# EAGLE board w4pcb (EAGLE 9.5.0)
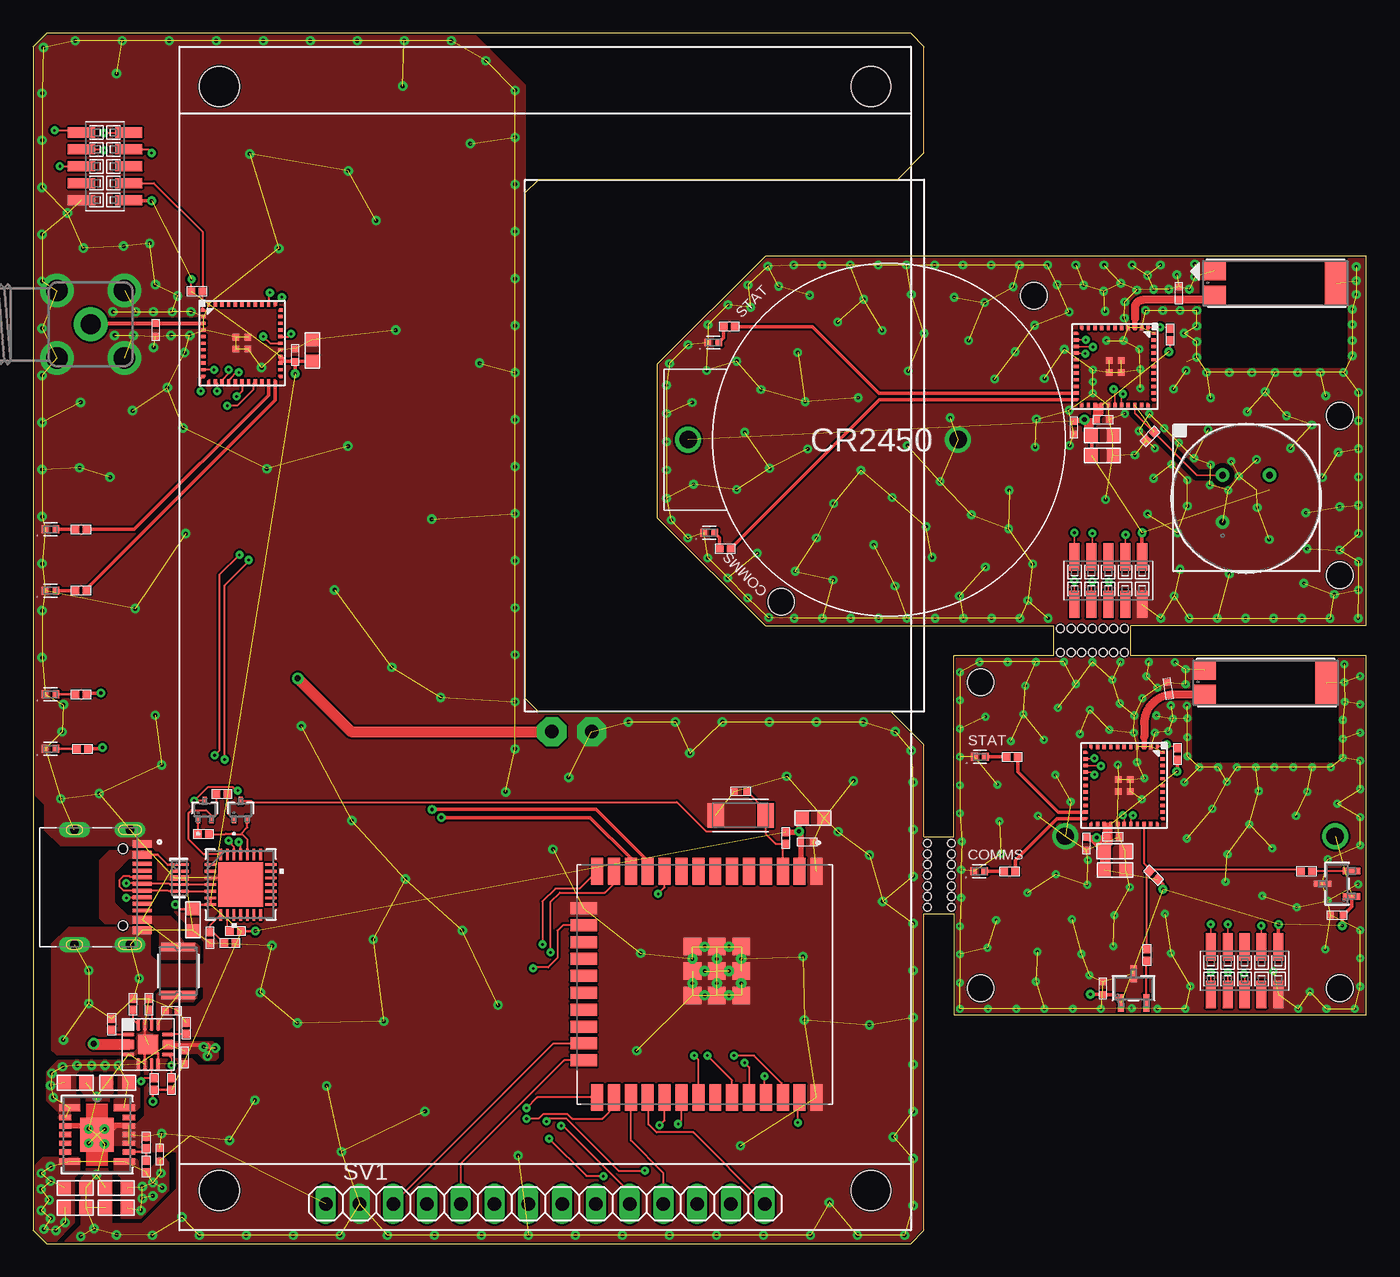
[diagram p0: board, top side]
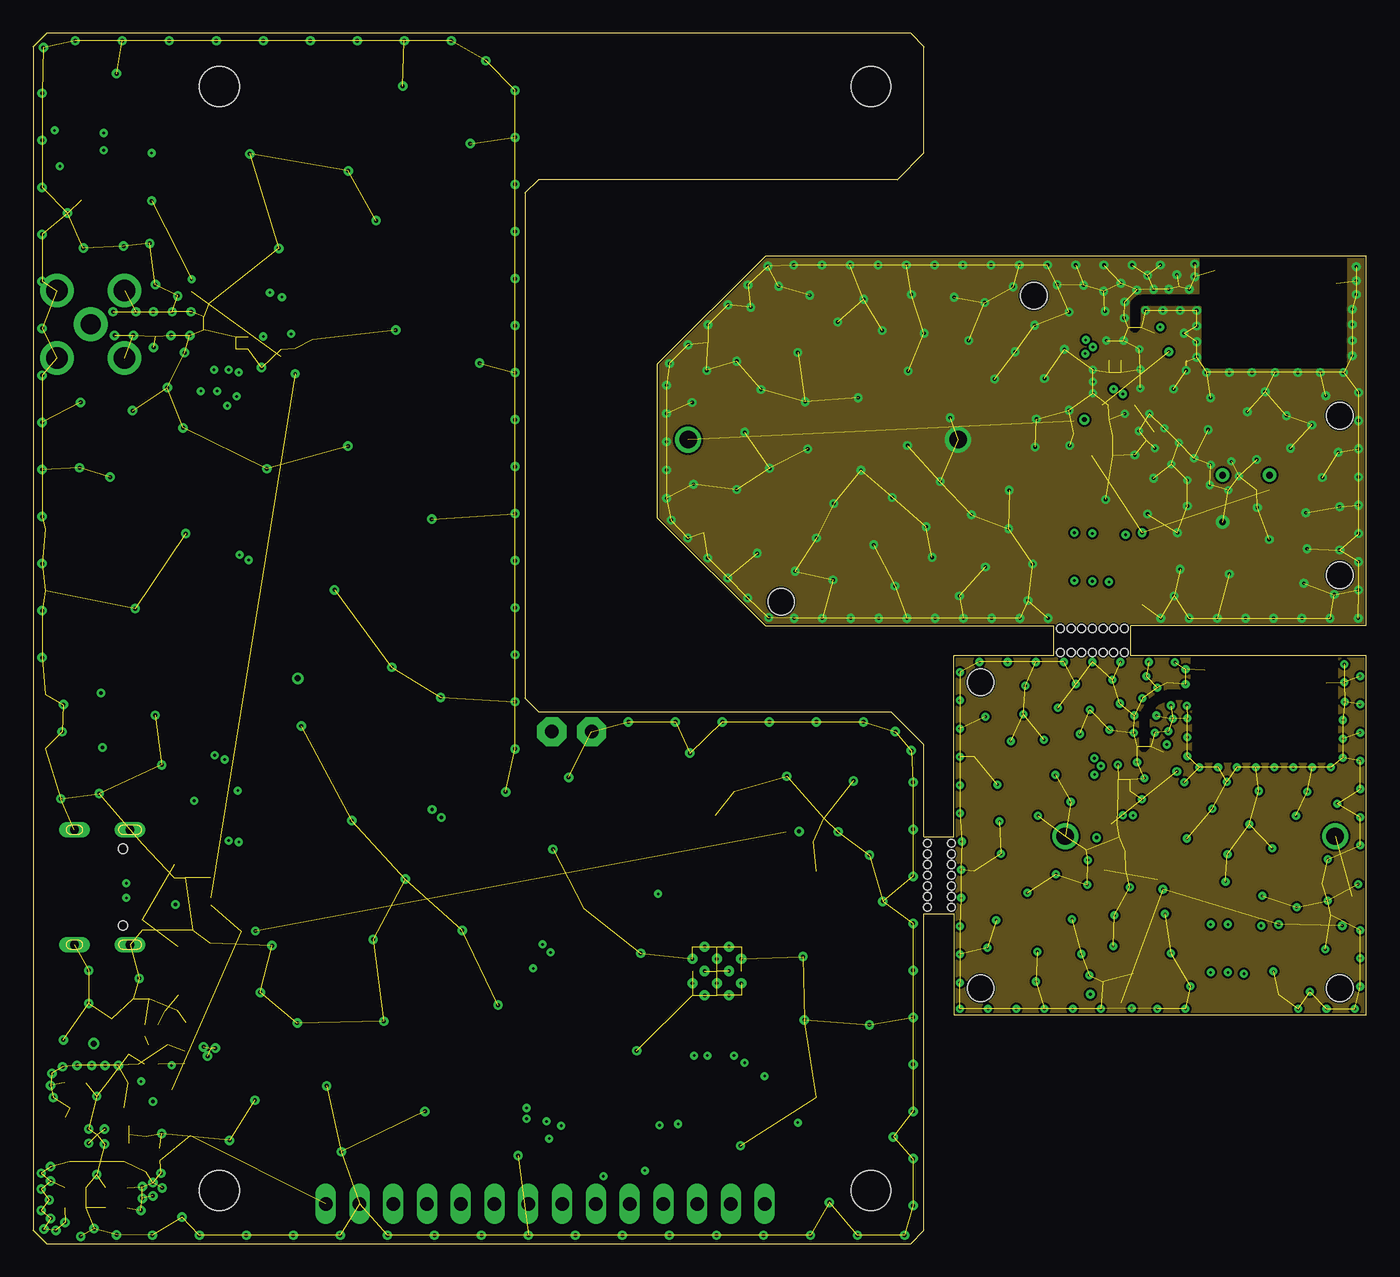
[diagram p1: board, inner layer Route2]
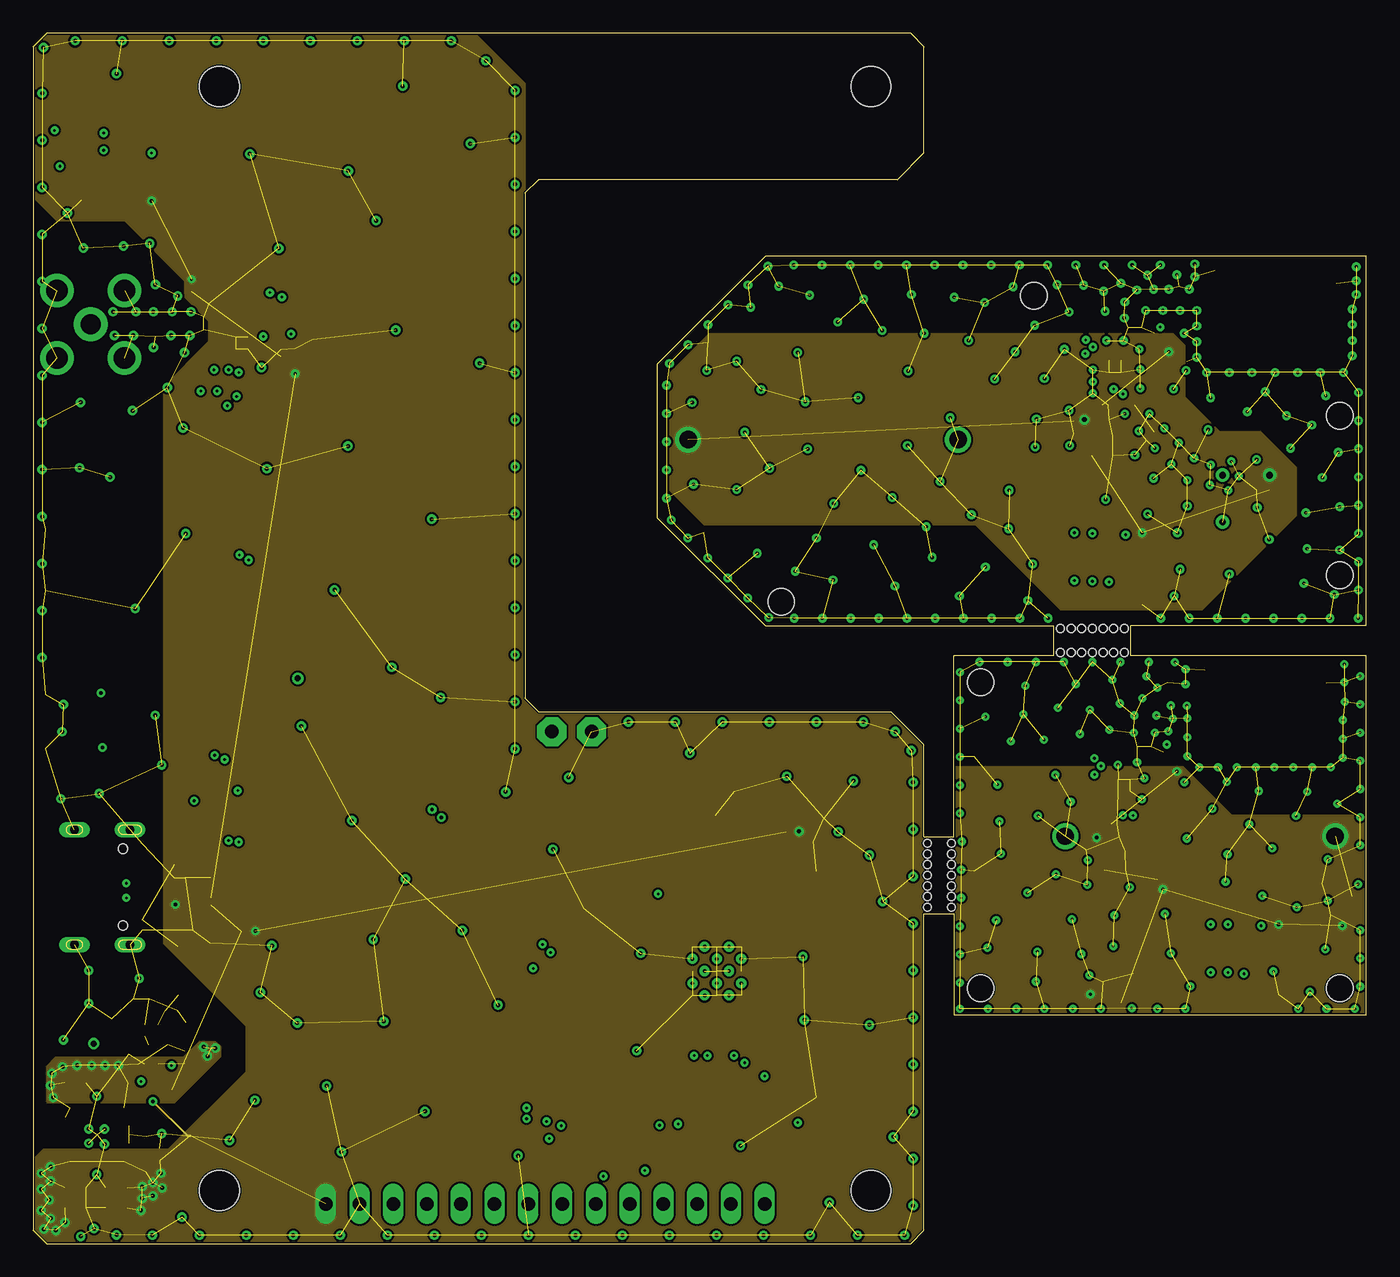
[diagram p2: board, inner layer Route15]
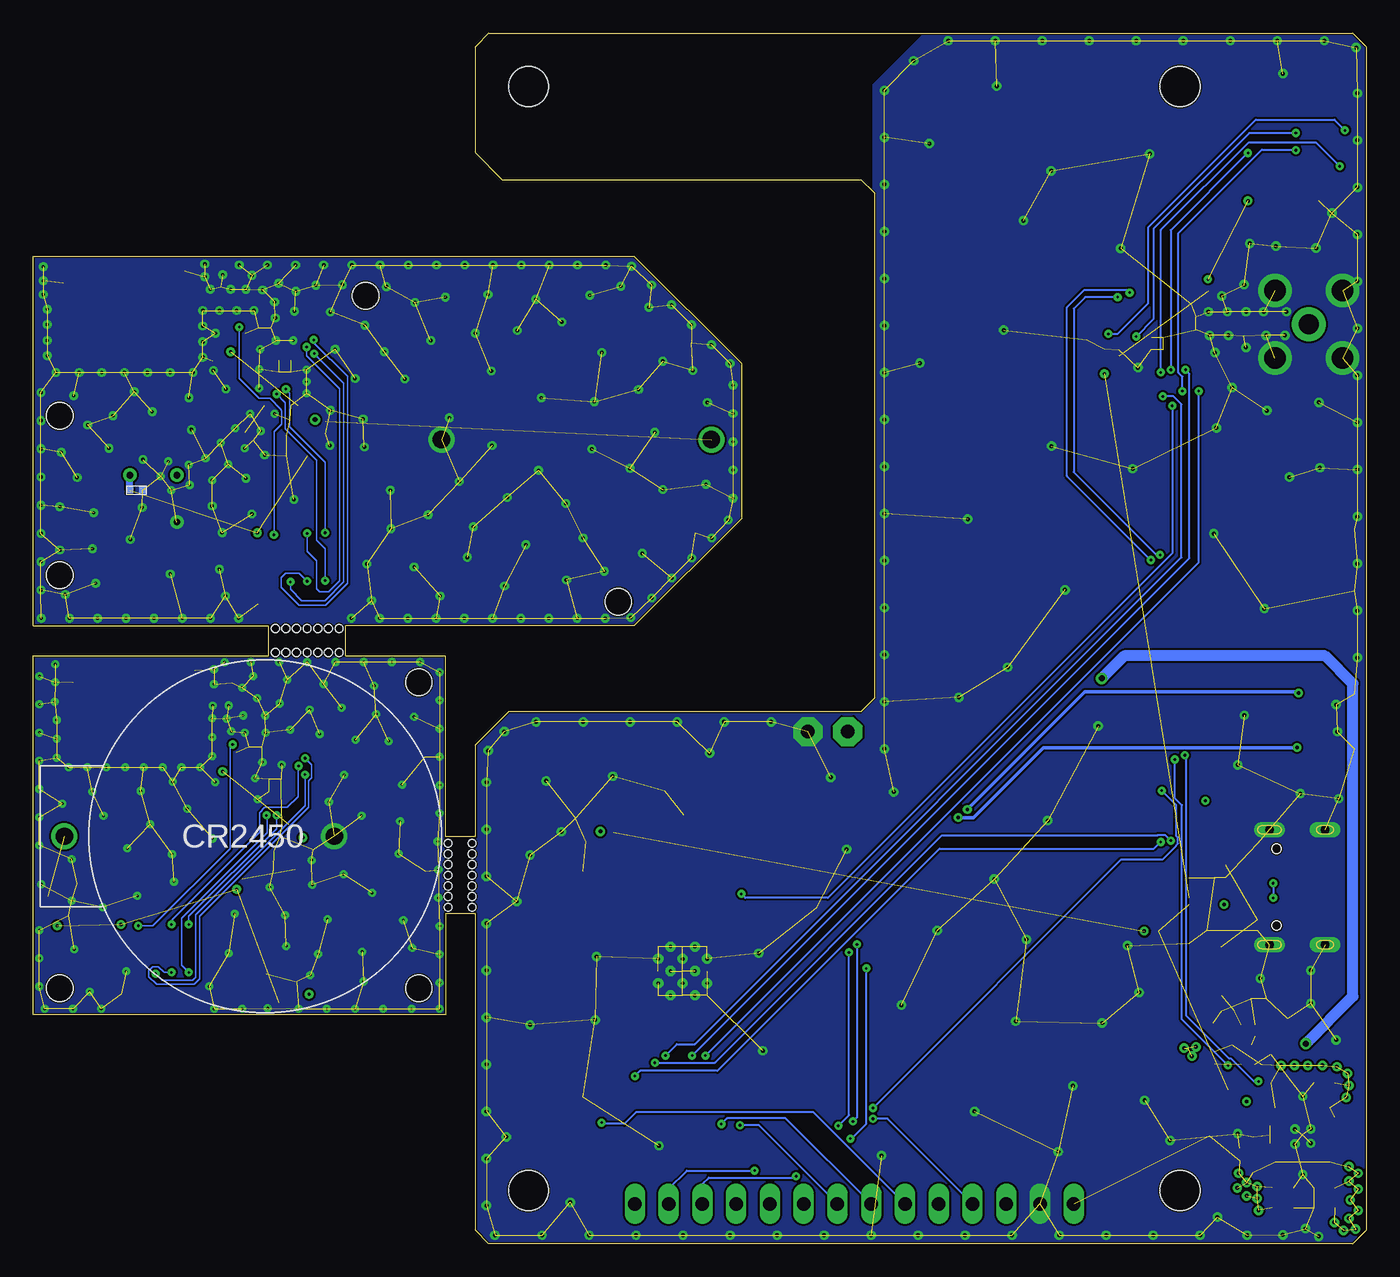
[diagram p3: board, bottom side, seen from below]

Size 100.25 x 91 mm. Coordinates in mm from the lower left corner, seen from the top.
Outline: 100.25,46.45 100.25,74.25 55.05,74.25 46.95,66.15 46.95,54.55 55.05,46.45 76.75,46.45 76.75,44.2 69.25,44.2 69.25,30.6 67,30.6 67,37.5 64.5,40 38,40 37,41 37,79 38,80 65,80 67,82 67,90 66,91 1,91 0,90 0,1 1,0 66,0 67,1 67,24.8 69.25,24.8 69.25,17.2 100.25,17.2 100.25,44.2 82.55,44.2 82.55,46.45 100.25,46.45
Copper layers (1+2*15+16): Top 0.035mm / dielectric 1.5mm / Route2 0.035mm / dielectric 0.15mm / Route15 0.035mm / dielectric 0.2mm / Bottom 0.035mm
Design rules "default *": minimum track width 5mil, minimum drill 0.2mm, track to track 6mil, track to pad 6mil, pad to pad 6mil, via to via 6mil, smd to smd 6mil, copper to edge 5mil, drill to drill 6mil, minimum pad ring 10mil, minimum via ring 8mil, stop-mask expansion 0mil, vias tented up to drill 40mil, thermal gap 0mil
Net classes: 2 NCLS3V7: width 0.178 mm, drill 0.178 mm, clearance 0.178 mm
Holes 2 mm at 56.25,48.25 98.25,50.25 98.25,62.25 75.25,71.25 71.25,19.2 71.25,42.2 98.25,19.2
Holes 0.6 mm at 78.05,46.25 78.85,46.25 79.65,46.25 80.45,46.25 81.25,46.25 82.05,46.25 77.25,46.25 78.05,44.45 78.85,44.45 79.65,44.45 80.45,44.45 81.25,44.45 82.05,44.45 77.25,44.45 69.05,29.3 69.05,28.5 69.05,27.7 69.05,26.9 69.05,26.1 69.05,25.3 69.05,30.1 67.25,29.3 67.25,28.5 67.25,27.7 67.25,26.9 67.25,26.1 67.25,25.3 67.25,30.1
Holes 3 mm at 63,4 14,4 63,87 14,87
tRestrict: area 88.7,57.1 to 90.2,58.5; 35 lines

## Footprints (pad centres in the part's own frame; a part is rotated, then mirrored left to right if it is on the bottom)
C0603R = smd 0.95 x 0.95: 1 -0.85,0; 2 0.75,0
C0402 = smd 0.5 x 0.5: 1 -0.475,0; 2 0.475,0
LEDC1005X35N = smd 0.59 x 0.61: 1 -0.415,0; 2 0.415,0
DPADS_0400-S = drill 1.016 pad 2.184 octagon: PAD 0,0
1210LSERIES_LTF-L = smd 0.635 x 2.591: 1 -1.816,0; 2 1.816,0
HRO_TYPE-C-31-M-12 = smd 0.6 x 1.45: A1B12 -3.25,5.095; A4B9 -2.45,5.095; B1A12 3.25,5.095; B4A9 2.45,5.095 | smd 0.3 x 1.45: A5 -1.25,5.095; A6 -0.25,5.095; A7 0.25,5.095; A8 1.25,5.095; B5 1.75,5.095; B6 0.75,5.095; B7 -0.75,5.095; B8 -1.75,5.095 | drill 0.65 pad 1.05 long: S1 -4.32,4.18; S2 4.32,4.18; S3 -4.32,0; S4 4.32,0 | hole 0.7: -2.89,3.65; 2.89,3.65
R0402 = smd 0.6 x 0.55: 1 -0.425,0; 2 0.425,0
RESC4217X170 = smd 1.254 x 1.829: 1 -1.875,0; 2 1.875,0
1X14 = drill 1.016 long: 1 -16.51,0; 2 -13.97,0; 3 -11.43,0; 4 -8.89,0; 5 -6.35,0; 6 -3.81,0; 7 -1.27,0; 8 1.27,0; 9 3.81,0; 10 6.35,0; 11 8.89,0; 12 11.43,0; 13 13.97,0; 14 16.51,0
SM353LT_HNW = smd 0.466 x 1.31: 1 -0.953,-1.092; 2 0.953,-1.092; 3 0,1.092
CHIP_3211_PUL = smd 1.7 x 1.45: 1 -4.277,-0.9; 3 -4.277,0.95 | smd 1.7 x 3.2: 2 4.877,0
SENSOR_B1201111_PAN = drill 0.508 pad 1.016: 1 0,0; 2 0,3.531; 3 3.531,3.531
S-PVQFN-N16 = smd 0.85 x 0.28: 1 -0.725,2.225; 4 -0.725,0.725; 9 2.225,0.725; 12 2.225,2.225 | smd 0.85 x 0.78: 2 -0.725,1.475; 10 2.225,1.475 | smd 0.28 x 0.85: 5 0,0; 6 0.5,0; 7 1,0; 8 1.5,0; 13 1.5,2.95; 14 1,2.95; 15 0.5,2.95; 16 0,2.95 | smd 1.5 x 1.5: TH 0.75,1.475
SC-75_ONS-L = smd 0.305 x 0.61: 1 -0.5,-0.699; 2 0.5,-0.699; 3 0,0.699
QFN28_5X5_SIL-L = smd 0.864 x 0.203: 1 -2.273,1.5; 2 -2.273,1; 3 -2.273,0.5; 4 -2.273,0; 5 -2.273,-0.5; 6 -2.273,-1; 7 -2.273,-1.5; 15 2.273,-1.5; 16 2.273,-1; 17 2.273,-0.5; 18 2.273,0; 19 2.273,0.5; 20 2.273,1; 21 2.273,1.5 | smd 0.203 x 0.864: 8 -1.5,-2.273; 9 -1,-2.273; 10 -0.5,-2.273; 11 0,-2.273; 12 0.5,-2.273; 13 1,-2.273; 14 1.5,-2.273; 22 1.5,2.273; 23 1,2.273; 24 0.5,2.273; 25 0,2.273; 26 -0.5,2.273; 27 -1,2.273; 28 -1.5,2.273 | smd 3.353 x 3.353: 29 0,0
DQA0010A = smd 0.565 x 0.2: 1 -0.417,1; 2 -0.417,0.5; 4 -0.417,-0.5; 5 -0.417,-1; 6 0.417,-1; 7 0.417,-0.5; 9 0.417,0.5; 10 0.417,1 | smd 0.565 x 0.4: 3 -0.417,0; 8 0.417,0
B3QFN15_RDA_TEX = smd 1.6 x 0.508: 1 -2.057,2.025; 7 -2.057,-2.025; 8 2.057,-2.025; 14 2.057,2.025 | smd 0.914 x 0.406: 2 -2.4,1.3; 3 -2.4,0.65; 4 -2.4,0; 5 -2.4,-0.65; 6 -2.4,-1.3; 9 2.4,-1.3; 10 2.4,-0.65; 11 2.4,0; 12 2.4,0.65; 13 2.4,1.3 | smd 2.54 x 2.54: 15 0,0
XCVR_ESP32-WROOM-32U = smd 2 x 0.9: 1 -8.5,8.41; 2 -8.5,7.14; 3 -8.5,5.87; 4 -8.5,4.6; 5 -8.5,3.33; 6 -8.5,2.06; 7 -8.5,0.79; 8 -8.5,-0.48; 9 -8.5,-1.75; 10 -8.5,-3.02; 11 -8.5,-4.29; 12 -8.5,-5.56; 13 -8.5,-6.83; 14 -8.5,-8.1; 25 8.5,-8.1; 26 8.5,-6.83; 27 8.5,-5.56; 28 8.5,-4.29; 29 8.5,-3.02; 30 8.5,-1.75; 31 8.5,-0.48; 32 8.5,0.79; 33 8.5,2.06; 34 8.5,3.33; 35 8.5,4.6; 36 8.5,5.87; 37 8.5,7.14; 38 8.5,8.41 | smd 0.9 x 2: 15 -5.715,-9.1; 16 -4.445,-9.1; 17 -3.175,-9.1; 18 -1.905,-9.1; 19 -0.635,-9.1; 20 0.635,-9.1; 21 1.905,-9.1; 22 3.175,-9.1; 23 4.445,-9.1; 24 5.715,-9.1 | smd 1.33 x 1.33: G.1 0.835,2.745; G.2 -1,2.745; G.4 -2.835,2.745; G.5 0.835,0.91; G.6 -1,0.91; G.7 -2.835,0.91; G.8 0.835,-0.925; G.9 -1,-0.925; G.10 -2.835,-0.925 | drill 0.254: G.11 -0.083,2.745; G.12 -1.917,2.745; G.13 0.835,1.827; G.14 -1,1.827; G.15 -2.835,1.827; G.16 -0.083,0.91; G.17 -1.917,0.91; G.18 0.835,-0.007; G.19 -1,-0.007; G.20 -2.835,-0.007; G.21 -0.083,-0.925; G.22 -1.917,-0.925
ZGM230S = smd 0.24 x 0.25: P$1 0.045,0; P$11 0.05,-5; P$23 5.955,-5; P$33 5.955,0 | smd 0.35 x 0.25: P$2 0.1,-0.5; P$3 0.1,-1; P$4 0.1,-1.5; P$5 0.1,-2; P$6 0.1,-2.5; P$7 0.1,-3; P$8 0.1,-3.5; P$9 0.1,-4; P$10 0.1,-4.5; P$24 5.9,-4.5; P$25 5.9,-4; P$26 5.9,-3.5; P$27 5.9,-3; P$28 5.9,-2.5; P$29 5.9,-2; P$30 5.9,-1.5; P$31 5.9,-1; P$32 5.9,-0.5 | smd 0.25 x 0.24: P$12 0.5,-5.455; P$22 5.5,-5.455; P$34 5.5,0.455; P$44 0.5,0.455 | smd 0.25 x 0.35: P$13 1,-5.4; P$14 1.5,-5.4; P$15 2,-5.4; P$16 2.5,-5.4; P$17 3,-5.4; P$18 3.5,-5.4; P$19 4,-5.4; P$20 4.5,-5.4; P$21 5,-5.4; P$35 5,0.4; P$36 4.5,0.4; P$37 4,0.4; P$38 3.5,0.4; P$39 3,0.4; P$40 2.5,0.4; P$41 2,0.4; P$42 1.5,0.4; P$43 1,0.4 | smd 0.5 x 0.5: P$45 2.55,-2.95; P$46 3.45,-2.95; P$47 3.45,-2.05; P$48 2.55,-2.05
BS-24 = drill 1.3: P$1 0,0; P$2 20.3,0
1296-10 = smd 0.76 x 2.05: 1 -2.54,-1.78; 2 -2.54,1.78; 3 -1.27,-1.78; 4 -1.27,1.78; 5 0,-1.78; 6 0,1.78; 7 1.27,-1.78; 8 1.27,1.78; 9 2.54,-1.78; 10 2.54,1.78
SMA90_DIP = drill 1.5 pad 2.54: ANTENNA 0,0 | drill 1.6 pad 2.54: GND1 -2.54,2.54; GND2 2.54,2.54; GND3 -2.54,-2.54; GND4 2.54,-2.54

## Placement (x,y rotation side)
C1  10u  [C0603R]  80.35,59.25 180 top
C2  10u  [C0603R]  80.35,60.75 180 top
C3  0.1u  [C0402]  80.45,61.95 180 top
C4  0.1u  [C0402]  78.25,61.35 90 top
C5  0.1u  [C0402]  86.15,71.45 270 top
C6  0.1u  [C0402]  92.5,56.65 180 bottom
C7  10u  [C0603R]  81.3,29.5 180 top
C8  10u  [C0603R]  81.31,28.1 180 top
C9  0.1u  [C0402]  98.05,24.7 0 top
C10  0.1u  [C0402]  81.19,30.6 180 top
C11  0.1u  [C0402]  85.35,41.72 278.8 top
C12  0.1u  [C0402]  79.2,30.08 90 top
C13  0.1u  [C0402]  80.45,19.2 270 top
C14  10u  [C0603R]  21,67.1 270 top
C15  10u  [C0603R]  58.6,32 180 top
C16  0.1u  [C0402]  19.7,66.8 270 top
C17  0.1u  [C0402]  58.2,30.2 180 top
C18  0.1u  [C0402]  9.2,68.7 90 top
C19  22u  [C0603R]  6.3,12.1 180 top
C20  22u  [C0603R]  3.2,12.1 0 top
C21  22u  [C0603R]  6.2,4.2 180 top
C22  4.7u  [C0402]  11.4,14 270 top
C23  1u  [C0402]  10.4,17.5 0 top
C24  100nF  [C0402]  9.5,6.7 90 top
C25  100nF  [C0402]  53.2,34 180 top
C35  22u  [C0603R]  3.2,4.2 0 top
C36  22u  [C0603R]  12,24.3 270 top
C37  22u  [C0603R]  3.2,2.7 0 top
C39  22u  [C0603R]  6.2,2.7 180 top
D1  VLMG1500-GS08  [LEDC1005X35N]  50.85,53.45 180 top
D2  VLMG1500-GS08  [LEDC1005X35N]  51.15,67.75 180 top
D3  VLMG1500-GS08  [LEDC1005X35N]  71.14,28 180 top
D4  VLMG1500-GS08  [LEDC1005X35N]  71.19,36.6 180 top
D5  VLMG1500-GS08  [LEDC1005X35N]  1.3,49.1 180 top
D6  VLMG1500-GS08  [LEDC1005X35N]  1.3,53.7 180 top
D7  VLMG1500-GS08  [LEDC1005X35N]  1.3,41.3 180 top
D8  VLMG1500-GS08  [LEDC1005X35N]  1.3,37.2 180 top
E1  DPADS_PAD-0400-S  [DPADS_0400-S]  39,38.5 90 top
E2  DPADS_PAD-0400-S  [DPADS_0400-S]  42,38.5 90 top
F2  1210L050YR1210LSERIES_LTF-L  [1210LSERIES_LTF-L]  10.9,20.5 270 top
J1  TYPE-C-31-M-12  [HRO_TYPE-C-31-M-12]  3.1,26.8 270 top
R1  1.5k  [R0402]  52.35,68.95 180 top
R2  10k  [R0402]  85.49,68.35 270 top
R3  10k  [R0402]  84,60.7 45 top
R4  1.5k  [R0402]  52.05,52.25 180 top
R5  1.5k  [R0402]  73.62,36.59 180 top
R6  10k  [R0402]  86.06,36.81 270 top
R7  1.5k  [R0402]  73.44,27.99 180 top
R8  0  [R0402]  95.75,28 0 top
R9  0  [R0402]  83.75,21.7 270 top
R10  10k  [R0402]  84.25,27.7 315 top
R11  10k  [R0402]  12.3,71.6 180 top
R12  1.5k  [R0402]  3.6,49.1 180 top
R13  1.5k  [R0402]  3.6,53.7 180 top
R14  10k  [R0402]  8.5,5.8 270 top
R15  10k  [R0402]  56.6,30.5 90 top
R16  4.32k  [R0402]  8.5,7.6 90 top
R17  10k  [R0402]  12.8,30.8 180 top
R18  46.4k  [R0402]  8.7,18 270 top
R19  1.18k  [R0402]  11.5,16.2 270 top
R20  10k  [R0402]  14.2,33.8 0 top
R21  1.13k  [R0402]  7.5,18 270 top
R22  10k  [R0402]  5.9,16.5 270 top
R23  10k  [R0402]  10.4,12 270 top
R24  10k  [R0402]  9.1,12 270 top
R25  47.5k  [R0402]  13.3,23 90 top
R26  22.1k  [R0402]  14.8,22.6 0 top
R27  1k  [R0402]  15.2,23.5 180 top
R28  1.5k  [R0402]  3.6,41.3 180 top
R29  1.5k  [R0402]  3.7,37.2 180 top
RESET  SMDSWITCH  [RESC4217X170]  53.2,32.2 0 top
SV1  [1X14]  38.5,3 0 top
U1  SM353LT  [SM353LT_HNW]  98.05,27.06 90 top
U2  W3211  [CHIP_3211_PUL]  93.12,72.2 0 top
U3  EKMB1201111  [SENSOR_B1201111_PAN]  89.45,54.25 0 top
U4  W3211  [CHIP_3211_PUL]  92.38,42.18 0 top
U5  SM353LT  [SM353LT_HNW]  82.75,19.2 0 top
U6  BQ24072  [S-PVQFN-N16]  7.9,13.5 0 top
U7  DTC114YET1GSC-75_ONS-L  [SC-75_ONS-L]  12.9,32.6 0 top
U9  CP2102N-A02-GQFN28QFN28_5X5_SIL-L  [QFN28_5X5_SIL-L]  15.6,27 0 top
U11  DTC114YET1GSC-75_ONS-L  [SC-75_ONS-L]  15.6,32.6 0 top
U12  Value  [DQA0010A]  11,27.5 0 top
U25  TPSM53602RDAR  [B3QFN15_RDA_TEX]  4.8,8.2 0 top
U28  ESP32-WROOM-32U  [XCVR_ESP32-WROOM-32U]  50.5,19.5 270 top
U$1  ZGM230S  [ZGM230S]  83.85,68.95 270 top
U$2  BS-24R  [BS-24]  69.55,60.45 180 top
U$3  ZGM230S  [ZGM230S]  84.54,37.45 270 top
U$4  BS-24R  [BS-24]  77.61,30.63 180 bottom
U$5  ZGM230S  [ZGM230S]  12.7,70.2 0 top
X1  1296-T10  [1296-10]  80.85,49.85 180 top
X2  1296-T10  [1296-10]  91.1,20.52 180 top
X3  [SMA90_DIP]  4.32,69.12 90 top
X4  1296-T10  [1296-10]  5.4,81 90 top

## Library data of the parts
C1 C2 C7 C8 C14 C15 C19-C21 C35-C37 C39 = eagle-ltspice
C3-C6 C9-C13 C16-C18 C22-C25 = eagle-ltspice; SPICEMODEL: NONE; SPICEPREFIX: C
D1-D8 = VLMG1500-GS08; AVAILABILITY: Unavailable; DESCRIPTION: 0402 GREEN 571nm 35MCD 65° Rectangle with Flat Top SMT LED; MF: Vishay; MP: VLMG1500-GS08; PACKAGE: 0402 Vishay; PRICE: None
E1 E2 = 52101-101-REV-A_v16; BOM: EXCLUDE
F2 = 1210 FUSE; BUILT_BY: EMA_UL_Team; MANUFACTURER_PART_NUMBER: 1210L050YR; SOURCELIBRARY: LittleFuse_2015-04-13; VENDOR: Littelfuse Inc
J1 = TYPE-C-31-M-12; AVAILABILITY: Not in stock; DESCRIPTION: USB Connectors 24 Receptacle 1 8.94*7.3mm RoHS; MF: HRO Electronics Co., Ltd.; MP: TYPE-C-31-M-12; PACKAGE: Package; PRICE: None
R1-R29 = eagle-ltspice; SPICEMODEL: NONE; SPICEPREFIX: R
RESET = SMD SWITCH
SV1 X3 = adafruit
U1 U5 = SM353LT; COPYRIGHT: Copyright (C) 2022 Ultra Librarian. All rights reserved.; MANUFACTURER_PART_NUMBER: SM353LT; MFR_NAME: Honeywell
U2 U4 = W3211; COPYRIGHT: Copyright (C) 2022 Ultra Librarian. All rights reserved.; MANUFACTURER_PART_NUMBER: W3211; MFR_NAME: Pulse Electronics Corporation
U3 = EKMB1110112; COPYRIGHT: Copyright (C) 2022 Ultra Librarian. All rights reserved.; MANUFACTURER_PART_NUMBER: EKMB1201111; MFR_NAME: Panasonic
U6 = Simplex-ICs
U7 U11 = DTC114YET1G; BUILT_BY: EMA_Justin; COPYRIGHT: Copyright (C) 2018 Accelerated Designs. All rights reserved; DATASHEET: https://www.onsemi.com/pub/Collateral/DTC114Y-D.PDF; MANUFACTURER_PART_NUMBER: DTC114YET1G; SOURCELIBRARY: ON_Semiconductor_2020-01-13; VENDOR: ON Semiconductor
U9 = CP2102N; BUILT_BY: EMA_Cory; COPYRIGHT: Copyright (C) 2018 Accelerated Designs. All rights reserved; DATASHEET: https://www.silabs.com/documents/public/data-sheets/cp2102n-datasheet.pdf; MANUFACTURER_PART_NUMBER: CP2102N-A02-GQFN28; SOURCELIBRARY: Silicon_Labs_2020-02-14; VENDOR: Silicon Labs
U12 = ESD204DQAR; MANUFACTURER: Texas Instruments; PARTNUMBER: ESD204DQAR; REFDES: RefDes; TYPE: TYPE
U25 = TPSM53602; BUILT_BY: EMA_Cory; COPYRIGHT: Copyright (C) 2018 Accelerated Designs. All rights reserved; DATASHEET: https://www.ti.com/lit/ds/symlink/tpsm53602.pdf?ts=1593032137197&ref_url=https%253A%252F%252Fwww.ti.com%252Fstore%252Fti%252Fen%252Fp%252Fproduct%252F%253Fp%253DTPSM53602RDAR; MANUFACTURER_PART_NUMBER: TPSM53602RDAR; SOURCELIBRARY: TI_2020-06-27; VENDOR: Texas Instruments
U28 = ESP32-WROOM-32U; AVAILABILITY: In Stock; DESCRIPTION: Bluetooth, WiFi 802.11b/g/n, Bluetooth v4.2 +EDR, Class 1, 2 and 3 Transceiver Module 2.4GHz ~ 2.5GHz Antenna Not Included, U.FL Surface Mount; MF: Espressif Systems; MP: ESP32-WROOM-32U; PACKAGE: Module Espressif Systems; PRICE: None; PURCHASE-URL: https://pricing.snapeda.com/search/part/ESP32-WROOM-32U/?ref=eda
U$1 U$3 U$5 = ZGM230S
U$2 U$4 = BS-24
X1 X2 X4 = con-leotronics; OC_FARNELL: unknown; OC_NEWARK: unknown

## Nets
5V: R26.2
BOOT: U7.3 U28.25
CHG: R23.1 U6.9 U$5.P$35
CS: SV1.3 U28.23
D+: J1.A6 J1.B6 U9.4 U12.4 U12.7
D-: J1.A7 J1.B7 U9.5 U12.5 U12.6
DC: SV1.5 U28.24
DTR: R20.1 U7.2 U9.28
GND: C1.1 C2.1 C3.1 C4.1 C5.1 C6.1 D1.2 D2.2 R3.1 U2.2 U2.3 U3.1 U$1.P$2 U$1.P$4 U$1.P$27 U$1.P$44 U$1.P$45 U$1.P$46 U$1.P$47 U$1.P$48 U$2.P$1 X1.2
GND1: C7.1 C8.1 C9.1 C10.1 C11.1 C12.1 C13.1 D3.2 D4.2 U1.3 U4.2 U4.3 U5.3 U$3.P$2 U$3.P$4 U$3.P$27 U$3.P$44 U$3.P$45 U$3.P$46 U$3.P$47 U$3.P$48 U$4.P$1 X2.2
GND3: C14.1 C15.1 C16.1 C17.1 C18.1 C19.2 C20.2 C21.2 C22.2 C23.2 C24.2 C25.2 C35.2 C36.2 C37.2 C39.2 D5.2 D6.2 D7.2 D8.2 E2.PAD J1.A1B12 J1.B1A12 J1.S1 J1.S2 J1.S3 J1.S4 R16.2 R18.1 R19.1 R21.1 R22.1 R25.1 RESET.1 SV1.2 U6.4 U6.6 U6.8 U6.15 U6.TH U9.3 U9.29 U12.3 U12.8 U25.3 U25.10 U25.11 U25.12 U25.15 U28.1 U28.15 U28.38 U28.G.1 U28.G.2 U28.G.4 U28.G.5 U28.G.6 U28.G.7 U28.G.8 U28.G.9 U28.G.10 U28.G.11 U28.G.12 U28.G.13 U28.G.14 U28.G.15 U28.G.16 U28.G.17 U28.G.18 U28.G.19 U28.G.20 U28.G.21 U28.G.22 U$5.P$2 U$5.P$4 U$5.P$27 U$5.P$44 U$5.P$45 U$5.P$46 U$5.P$47 U$5.P$48 X3.GND1 X3.GND2 X3.GND3 X3.GND4 X4.2
IO1: U28.31 U$5.P$11
IO2: U28.33 U$5.P$10
IO3: U28.36 U$5.P$17
IO4: U28.10 U$5.P$19
LCDRST: SV1.4 U28.26
LED: SV1.8 U28.29
N$1: D2.1 R1.2
N$2: R1.1 U$1.P$21
N$3: R4.1 U$1.P$22
N$4: R3.2 U3.2 U$1.P$31
N$5: C5.2 U2.1 U$1.P$3
N$6: C11.2 U4.1 U$3.P$3
N$7: D1.1 R4.2
N$8: D3.1 R7.2
N$9: D4.1 R5.2
N$10: R5.1 U$3.P$21
N$11: R7.1 U$3.P$22
N$12: R8.1 R9.1 R10.1 U$3.P$31
N$13: R8.2 U1.2
N$14: R9.2 U5.2
N$15: C18.2 U$5.P$3 X3.ANTENNA
N$16: D5.1 R12.2
N$17: D6.1 R13.2
N$18: R13.1 U$5.P$21
N$19: R12.1 U$5.P$22
N$20: R18.2 U6.14
N$21: R19.2 U6.12
N$22: R21.2 U6.16
N$23: R25.2 R26.1 U9.8
N$24: R27.2 U9.9
N$25: D7.1 R28.2
N$26: D8.1 R29.2
N$27: R29.1 U28.12
N$28: R28.1 U28.11
N$29: R20.2 U11.1
N$30: R17.2 U7.1
N$91: R14.1 R16.1 U25.9
PGOOD: R24.1 U6.7 U$5.P$34
PTI_DATA: U$1.P$29 X1.10
PTI_DATA1: U$3.P$29 X2.10
PTI_DATA2: U$5.P$29 X4.10
PTI_FRAME: U$1.P$28 X1.9
PTI_FRAME1: U$3.P$28 X2.9
PTI_FRAME2: U$5.P$28 X4.9
RESET: R2.1 U$1.P$1 X1.3
RESET1: R6.1 U$3.P$1 X2.3
RESET2: R11.1 U$5.P$1 X4.3
RST: C25.1 R15.1 RESET.2 U11.3 U28.3
RTS: R17.1 U9.24 U11.2
RX: X1.4
RX1: X2.4
RX2: X4.4
RXD: U9.26 U28.34
SCK: SV1.7 U28.30
SDI: SV1.6 U28.37
SDO: SV1.9
SWCLK: U$1.P$13 X1.8
SWCLK1: U$3.P$13 X2.8
SWCLK2: U$5.P$13 X4.8
SWDIO: U$1.P$14 X1.7
SWDIO1: U$3.P$14 X2.7
SWDIO2: U$5.P$14 X4.7
SWO: U$1.P$15 X1.6
SWO1: U$3.P$15 X2.6
SWO2: U$5.P$15 X4.6
T_CLK: SV1.10 U28.13
T_CS: SV1.11 U28.27
T_DI: SV1.12 U28.16
T_DO: SV1.13 U28.14
T_IRQ: SV1.14 U28.28
TS: R22.2 U6.1
TX: X1.5
TX1: X2.5
TX2: X4.5
TXD: U9.25 U28.35
VBAT: E1.PAD U6.2
VBUS: F2.1 J1.A4B9 J1.B4A9 U12.1 U12.10
VDD: C1.2 C2.2 C3.2 C4.2 C6.2 R2.2 U3.3 U$1.P$25 U$1.P$26 U$2.P$2 X1.1
VDD1: C7.2 C8.2 C9.2 C10.2 C12.2 C13.2 R6.2 R10.2 U1.1 U5.1 U$3.P$25 U$3.P$26 U$4.P$2 X2.1
VDD2: C14.2 C15.2 C16.2 C17.2 C21.1 C24.1 C35.1 C36.1 C37.1 C39.1 R11.2 R14.2 R15.2 R23.2 R24.2 R27.1 SV1.1 U9.6 U9.7 U25.7 U25.8 U28.2 U$5.P$25 U$5.P$26 X4.1
VIN: C23.1 F2.2 U6.13
VPROC [NCLS3V7]: C19.1 C20.1 C22.1 U6.5 U6.10 U25.1 U25.2 U25.14

## Tracks (layer width: path | path; a pad name or v marks a point on that pad's centre or on a via)
BOOT  (via drill 0.2)
  Top 0.15: U7.3 v12.1,33.3 | v12.1,33.3 | U28.25 37.9,11 v37.1,10.2 | v15.38,34.06 15.26,34.06 15.02,34.3 13.11,34.3 v12.1,33.3
  Bottom 0.15: v37.1,10.2 18.4,28.9 15.3,28.9 14.3,29.9 14.3,29.95 14.17,30.08 14.17,30.52 14.3,30.65 14.3,32.98 v15.38,34.06
CHG  (via drill 0.2)
  Top 0.127: v10.4,13.4 10.4,13.95 U6.9
  Top 0.15: R23.1 v10.4,13.4 | v14.4,36.4 14.4,49.5 16.2,51.3 v16.2,51.4 | v17.8,71.5 17.7,71.4 U$5.P$35
  Bottom 0.15: v10.4,13.4 13.87,16.87 13.87,32.97 14.4,33.51 v14.4,36.4 | v16.2,51.4 22.5,57.7 22.5,70.4 21.2,71.7 18,71.7 v17.8,71.5
CS
  Top 0.15: SV1.3 39.12,15.06 U28.23
D+  (via drill 0.2)
  Top 0.15: U12.4 10.28,27 10.23,27.05 J1.A6 8.14,27.1 v7,27.1 | U9.4 U12.7 | v7,26 7.05,26.05 J1.B6
  Top 0.2: U12.7 U12.4
  Bottom 0.15: v7,27.1 v7,26
D-
  Top 0.15: U12.5 10.18,26.5 10.13,26.55 J1.A7 8.14,26.5 7.5,26.5 7.43,26.57 6.78,26.57 6.47,26.88 6.47,27.32 6.78,27.63 7.22,27.63 7.3,27.55 J1.B7 | U12.6 U9.5 | U9.5
  Top 0.2: U12.5 U12.6
DC
  Top 0.15: SV1.5 32.15,6 39.94,13.78 U28.24
DTR
  Top 0.15: R20.1 13.78,32.28 13.55,32.05 | 13.55,32.05 U7.2 | U9.28 12.83,29.27 11.7,30.4 11.7,32.4 11.9,32.6 13,32.6 13.55,32.05
GND  (via drill 0.2, 0.25)  (223 unrouted)
  Route2 0.152: v86.7,65.65 86.7,66.3 86.75,66.35
  other vias: 87.5,70.15 86.25,70.15 84.95,70.15 83.65,70.15 86.95,71.75 87.35,72.7 87.35,73.65 82.05,69.6 82.1,70.8 83,71.7 84.25,71.75 85.4,71.75 99.2,67.9 99.2,69.1 99.2,70.25 99.2,66.75 98.55,65.5 96.8,65.5 95.1,65.5 93.4,65.5 91.65,65.5 89.95,65.5 88.25,65.5 87.5,66.65 87.5,67.8 87.5,69 99.5,71.35 99.5,72.4 99.5,73.45 90.65,57.7 90.1,58.81 88.55,58.56 89.87,56.66 88.49,57.04 86.8,57.4 87.3,59.05 85.6,58.6 86.15,60.2 85.05,61.3 84.35,59.8 83.15,61.1 83.95,62.4 82.1,62.4 80.7,67.9 82,67.9 83.2,67.25 83.25,65.75 83.25,64.3 79.7,63.95 79.7,64.8 79.7,65.7 97.85,48.8 98.25,52.15 95.8,52.25 95.55,49.65 86.25,50.7 89.95,50.35 85.8,48.7 92.95,52.95 95.7,54.95 98.25,55.4 96.95,57.6 98.15,59.5 92,58.95 94.55,59.8 92.05,55.35 86.8,55.45 86.05,53.45 83.8,54.85 84.25,57.55 82.85,59.3 80.65,55.95 88.55,63.6 88.35,61.2 91.3,62.55 92.65,64.05 85.75,64.25 96.15,61.55 97.2,63.75 60.2,55.65 86.55,68.45 86,72.85 83.8,72.8 81.8,72.2 80.5,71.6 80.6,70.1 79,72.05 77.9,70.05 77,72.1 73.7,71.95 75.3,69.05 77.55,67.25 76.05,65.05 73.85,67.05 70.35,67.9 72.3,65 71.55,70.75 69.25,71.15 67,68.45 66.05,71.35 65.8,65.6 62.45,71 63.85,68.65 60.5,69.3 58.4,71.3 53.95,70.4 57.5,67 58.05,63.3 62.05,63.6 52.9,66.35 50.65,65.65 49.55,63.25 53.5,61 49.65,57.1 52.9,56.7 54.45,51.9 57.3,50.55 70.55,54.8 58.9,53.05 60.15,49.9 62.25,58.15 58.25,59.75 63.2,52.55 67.15,53.9 64.8,49.45 67.6,51.6 73.35,53.75 69.65,48.7 74.8,48.35 73.4,56.65 68.2,57.3 65.75,60 68.95,62.1 75.35,59.9 75.45,62 77.95,60 94.25,62.25 99.68,49.15 99.68,51.27 99.68,53.39 99.68,55.51 99.68,57.63 99.68,59.76 99.68,61.88 99.68,64 54.73,64.22 55.38,58.29 47.63,56.05 47.63,58.17 47.63,60.29 47.63,62.41 47.63,64.53 56.06,71.98 84.77,73.58 82.65,73.58 80.52,73.58 78.4,73.58 76.28,73.58 74.16,73.58 72.04,73.58 69.92,73.58 67.8,73.58 65.68,73.58 63.55,73.58 61.43,73.58 59.31,73.58 57.19,73.58 55.25,73.48 53.75,72.08 52.25,70.58 47.85,66.18 50.75,69.08 49.25,67.58 47.98,54.4 49.23,53.05 53.73,48.55 50.73,51.55 52.23,50.05 99.65,47.03 97.53,47.03 95.41,47.03 93.29,47.03 91.17,47.03 89.04,47.03 86.92,47.03 84.8,47.03 76.32,47.03 74.2,47.03 72.07,47.03 69.95,47.03 67.83,47.03 65.71,47.03 63.59,47.03 61.47,47.03 59.35,47.03 57.23,47.03 55.3,47.08 77.9,62.65 75.15,51.1 71.6,50.88 64.6,56.1
  pour Top: 46.95,66.15 55.05,74.25 88,74.25 88,73.8 89.65,73.8 89.65,72.5 87.65,72.5 87.65,71.1 87.8,70.95 87.8,65.8 98.9,65.8 98.9,70.65 97.2,70.65 97.2,73.75 98.9,73.75 98.9,74.25 100.25,74.25 100.25,46.45 55.05,46.45 46.95,54.55
  pour Bottom: 46.95,66.1 55.15,74.3 100.35,74.3 100.35,46.35 55.05,46.35 46.95,54.45
  pour Route2: 46.9,54.35 46.9,66.15 55,74.25 82.4,74.25 82.4,65.75 98.9,65.75 98.9,74.1 100.25,74.1 100.25,46.5 54.75,46.5
  pour Route2: 81.6,74.15 87.65,74.15 87.65,71.4 83.4,71.4 arc90 82.35,70.35 81.6,70.35
  pour Route2: 82.45,68.65 82.65,68.45 83.05,68.45 83.3,68.7 83.3,69.25 83.35,69.3 83.35,70.3 arc-90 83.5,70.45 87.8,70.45 87.8,65.85 82.15,65.85 82.15,68.65
GND1  (via drill 0.2)  (153 unrouted)
  other vias: 69.68,19.63 69.68,21.75 69.68,23.87 69.78,26 69.78,28.12 69.83,30.24 69.68,32.36 69.68,34.48 69.68,36.6 69.68,38.72 69.68,40.84 69.68,42.97 83.89,43.73 81.77,43.73 79.64,43.73 77.52,43.73 75.4,43.73 73.28,43.73 71.16,43.73 86.81,36.66 85.87,43.72 99.79,42.67 99.79,40.55 99.79,38.43 99.79,36.31 99.79,34.18 99.79,32.06 99.79,29.94 99.64,27.02 97.34,25.8 99.79,23.58 99.79,21.46 99.79,19.33 99.38,17.66 97.26,17.66 95.14,17.66 86.66,17.66 84.53,17.66 82.61,17.71 80.29,17.66 78.17,17.66 76.05,17.66 73.93,17.66 71.81,17.66 69.68,17.66 86.81,38.07 86.81,39.49 86.76,40.45 86.66,42.07 86.66,43.18 85.56,40.46 84.54,41.81 84.48,39.71 82.81,39.71 83.4,41.01 84.33,38.41 82.77,38.41 85.36,38.51 85.69,39.46 97.59,35.81 96.18,35.81 94.76,35.81 93.35,35.81 91.93,35.81 90.52,35.81 89.11,35.81 87.69,35.81 98.59,43.56 98.59,42.2 98.64,40.73 98.49,39.37 98.49,37.96 98.49,36.54 71.62,39.62 74.62,41.95 83.72,42.68 86.57,34.7 81.17,42.38 81.72,40.61 76.87,35.24 78.02,33.22 72.67,31.75 89.77,34.73 88.67,32.71 95.82,33.98 94.97,32.16 98.07,33.09 91.47,31.52 92.42,26.15 78.82,21.78 74.47,39.82 77.07,40.3 78.42,42.08 79.47,40.15 73.52,37.78 72.52,34.51 76.02,37.89 78.72,38.32 80.92,38.65 75.57,32.18 72.77,29.31 92.17,34.03 86.77,30.46 89.82,29.29 93.17,29.72 97.37,28.9 72.42,24.33 79.27,26.98 82.47,26.81 79.32,28.84 76.92,27.77 85.57,21.85 74.77,26.38 75.52,21.96 71.77,22.23 75.42,19.71 79.42,20.19 89.67,27.22 78.12,24.4 81.22,22.38 85.12,24.8 97.17,22.13 96.02,18.96 95.02,25.28 93.27,20.47 87.02,19.35 81.32,24.68 83.57,35 83.37,33.4 83.02,36.2 81.57,36
  pour Top: 69.25,44.2 87.2,44.2 87.2,43.77 88.9,43.77 88.9,42.45 86.97,42.45 86.97,41.73 85.7,41.73 arc90 83.1,39.12 83.1,37.15 83.33,36.92 83.72,36.92 84,37.2 84,39.05 arc-90 85.78,40.83 87.1,40.83 87.1,36.12 98.2,36.12 98.2,40.58 98.15,40.62 96.47,40.62 96.47,43.73 98.15,43.73 98.15,44.15 100.22,44.15 100.22,17.25 69.3,17.25 69.3,44.15
  pour Bottom: 69.3,44.25 100.25,44.25 100.25,17.1 69.3,17.1
GND2
  pour Route2: 69.25,44.2 86.97,44.2 86.97,41.73 85.7,41.73 arc90 83.1,39.12 83.1,37.15 83.33,36.92 83.72,36.92 84,37.2 84,39.05 arc-90 85.78,40.83 87.1,40.83 87.1,36.12 98.2,36.12 98.2,44.15 100.22,44.15 100.22,17.25 69.3,17.25 69.3,44.15
GND3  (via drill 0.3)  (249 unrouted)
  Top 0.2: U9.3 15.1,27.5 U9.29
  Top 0.203: U6.6 8.4,14.72 U6.TH 8.72,14.97 9.4,14.3 U6.8 | U6.15 8.4,15.6
  Top 0.406: U25.3 4.15,8.85 U25.15 5.5,8.2 6.2,8.9 7.15,8.9 U25.12
  other vias: 11.78,68.29 11.38,66.99 10.36,68.29 9.05,67.39 7.53,68.29 6.12,68.29 11.19,1.99 45.39,14.51 64.69,8.02 45.69,21.84 39.09,29.65 53.19,7.37 57.89,21.58 61.69,34.79 62.89,29.21 57.99,16.82 63.89,25.74 62.89,16.45 49.39,36.88 25.79,76.92 3.49,58.34 23.69,80.65 10.09,64.36 2.59,77.48 6.79,74.99 9.19,72.11 27.79,87.02 16.29,81.94 3.57,0.56 4.17,7.56 6.27,0.67 4.77,11.08 4.77,5.2 5.37,8.61 4.17,8.63 4.57,1.14 3.77,74.85 6.27,87.97 5.37,7.48 23.17,6.91 2.27,15.33 7.97,19.94 4.17,20.55 4.17,18.07 16.67,10.78 17.07,18.9 27.97,27.41 9.17,39.73 56.67,35.14 40.27,35.05 23.67,59.97 29.97,54.48 33.57,66.2 32.87,82.71 7.47,62.62 5.77,57.64 7.67,47.75 17.17,65.87 0.77,89.92 0.67,86.49 0.67,82.95 0.67,79.42 0.67,75.88 0.67,72.35 0.67,68.81 0.67,65.27 0.67,61.74 0.67,58.2 0.67,54.67 0.67,51.13 0.67,47.6 0.67,44.06 2.27,40.53 2.17,38.49 2.07,33.45 34.04,88.93 35.53,33.97 30.63,41.07 36.23,37.21 36.23,40.74 36.23,44.28 36.23,47.81 36.23,51.35 36.23,54.88 36.23,58.42 36.23,61.95 36.23,65.49 36.23,69.03 36.23,72.56 36.23,76.1 36.23,79.63 36.23,83.17 36.23,86.7 31.44,90.43 27.9,90.43 24.37,90.43 20.83,90.43 17.3,90.43 13.76,90.43 10.23,90.43 6.69,90.43 3.15,90.43 60.53,30.97 66.03,37.07 64.83,38.51 62.43,39.23 58.9,39.23 55.36,39.23 51.83,39.23 48.29,39.23 44.75,39.23 66.17,34.69 66.17,31.15 66.17,27.62 66.17,24.08 66.17,20.55 66.17,17.01 66.17,13.47 66.17,9.94 66.17,6.4 66.17,2.87 65.52,0.63 61.99,0.63 58.45,0.63 54.92,0.63 51.38,0.63 47.85,0.63 44.31,0.63 40.77,0.63 37.24,0.63 33.7,0.63 30.17,0.63 26.63,0.63 23.1,0.63 19.56,0.63 16.03,0.63 12.49,0.63 8.95,0.63 11.86,70.06 10.86,71.26 10.45,70.06 9.04,70.06 7.72,70.06 6.01,70.06 59.86,3.11 36.46,6.62 34.96,17.94 29.46,9.95 14.76,7.76 9.66,8.28 19.86,16.59 17.96,22.41 26.36,16.72 4.96,33.83 32.26,23.55 22.06,11.86 25.56,22.88 9.66,35.99 23.96,31.81 20.16,38.92 26.96,43.33 22.66,49.15 17.56,58.26 27.26,68.68 11.46,53.39 8.76,75.21 18.46,74.82 11.26,61.33 3.56,63.25
  pour Top: 4,10.5 4,11.1 3.6,11.5 3.6,12.5 6,12.5 6,11.4 5.7,11.1 5.7,10.6 5.6,10.5
  pour Top: 3.6,1.4 3.6,4.9 4,5.3 4,6.1 5.6,6.1 5.6,5.5 5.9,5.2 5.9,1.5 8.2,1.5 10.5,3.8 10.5,0 2.2,0
  pour Top: 5.8,8.3 6.5,9 7.8,9 8.4,9.6 8.4,13.9 11.9,13.9 12.6,13.2 12.6,7.7 11.8,6.9 8.2,6.9 7.7,7.4 6,7.4 5.8,7.6
  pour Top: 7.7,14.2 1.8,14.2 1.4,14.6 1.4,22.5 2.7,23.8 8.8,23.8 8.8,21.7 9.5,21 12.9,21 12.9,19.3 9.4,19.3 9,18.9 9,15.5
  pour Top: 10.8,16.1 10.8,17.8 12.2,17.8 12.8,18.4 12.8,21 16.2,21 16.4,20.8 16.4,17.4 14.6,15.6 11.3,15.6
  pour Top: 12.9,21 12.9,22.7 12.5,23.1 11.5,23.1 11.5,24.1 9.4,26.2 9.4,29.4 8.9,29.9 2.1,29.9 0.9,31.1 0.9,32.9 3,35 17,35 21.7,30.3 21.7,25.1 17.4,20.8 13.1,20.8
  pour Top: 10.3,3.6 10.8,4.1 10.8,12.1 12.1,13.4 14.1,13.4 14.4,13.7 14.4,19.4 19.6,24.6 19.6,31.6 16.5,34.7 2.9,34.7 1.2,33 0.9,33 0,33.9 0,90 0.9,90.9 33.2,90.9 37,87.1 37,41 37.9,40.1 64.3,40.1 67.15,37.25 67.15,1.15 66,0 10.7,0 10.3,0.4
  pour Bottom: 0,89.9 1,90.9 33.3,90.9 37.1,87.1 37.1,40.8 37.9,40 64.5,40 67.25,37.25 67.25,1.25 66,0 1,0 0,1
IO1  (via drill 0.2)
  Top 0.15: U28.31 50.02,13.82 v49.7,14.14 | v12.6,64.1 12.6,65.05 U$5.P$11
  Bottom 0.15: v49.7,14.14 12.6,51.24 v12.6,64.1
IO2  (via drill 0.2)
  Top 0.15: U28.33 52.56,12.28 v50.7,14.14 | v13.6,65.7 U$5.P$10
  Bottom 0.15: v50.7,14.14 13.3,51.54 13.3,65.4 v13.6,65.7
IO3  (via drill 0.2)
  Top 0.15: U28.36 56.28,11.09 56.28,12.07 54.21,14.14 v52.7,14.14 | U$5.P$17 15.7,64.1 v15.3,63.7
  Bottom 0.15: v52.7,14.14 51.84,15 50.5,15 13.9,51.6 13.9,63.1 14.5,63.7 v15.3,63.7
IO4  (via drill 0.2)
  Top 0.15: U$5.P$19 16.55,64.65 16.55,64.2 15.35,63 v14.6,63 | v47,26.3 47.48,26.78 U28.10
  Bottom 0.15: v14.6,63 14.6,51.9 40.5,26 46.7,26 v47,26.3
LCDRST  (via drill 0.2)
  Top 0.15: U28.26 43.8,10.87 43.8,10.4 42.8,9.4 40.53,9.4 40.2,9.73 38.33,9.73 38,9.4 v37.1,9.4
  Bottom 0.15: SV1.4 36.01,9.4 v37.1,9.4
LED  (via drill 0.2)
  Top 0.15: v47.1,8.9 47.48,9.28 U28.29
  Bottom 0.15: SV1.8 45.67,8.9 v47.1,8.9
N$1
  Top 0.254: D2.1 51.92,68.11 R1.2
N$2
  Top 0.254: U$1.P$21 63.6,63.95 58.6,68.95 R1.1
N$3
  Top 0.254: U$1.P$22 63.65,63.45 52.48,52.27 R4.1
N$4  (1 unrouted)
  Top 0.127: U3.2 87.52,57.78 82.85,62.45 U$1.P$31
N$5
  Top 0.203: C5.2 86.17,70.95 86.3,70.95
  Top 0.406: 82.85,69.55 U$1.P$3
  Top 0.55: U2.1 88.49,70.95
  Top 0.6: 82.85,69.55 82.85,70.35 arc-90 83.45,70.95 86.3,70.95 88.49,70.95
N$6
  Top 0.127: C11.2 85.45,41.28 85.73,41.28
  Top 0.406: 83.55,38.1 U$3.P$3
  Top 0.6: U4.1 85.73,41.28 arc90 83.55,39.1 83.55,38.1
N$7
  Top 0.254: D1.1 51.62,53.09 R4.2
N$8
  Top 0.254: D3.1 73,28 R7.2
N$9
  Top 0.254: R5.2 D4.1
N$10
  Top 0.254: U$3.P$21 77.09,32.45 74.05,35.49 R5.1
N$11
  Top 0.254: R7.1 73.86,28.82 77,31.95 U$3.P$22
N$12
  Top 0.152: R8.1 95.22,28.1 84.05,28.1 R10.1 | R9.1 83.75,27.8 R10.1 | U$3.P$31 83.54,28.61 84.05,28.1 R10.1
N$13
  Top 0.152: U1.2 R8.2
N$14
  Top 0.152: U5.2 83.7,21.23 R9.2
N$15
  Top 0.305: 9.14,69.12 C18.2 | U$5.P$3 9.22,69.2 C18.2 | C18.2 4.38,69.17 X3.ANTENNA
N$16
  Top 0.254: D5.1 R12.2
N$17
  Top 0.254: D6.1 R13.2
N$18
  Top 0.254: R13.1 7.6,53.7 17.7,63.8 U$5.P$21
N$19
  Top 0.254: U$5.P$22 18.2,63.4 4.03,49.23 R12.1
N$20
  Top 0.15: R18.2 8.9,17.38 U6.14
N$21
  Top 0.15: U6.12 10.17,15.78 R19.2
N$22
  Top 0.15: U6.16 7.5,16.85 R21.2
N$23
  Top 0.127: U9.8 13.3,23.93 R25.2 13.55,23.42 R26.1
N$24
  Top 0.127: U9.9 14.6,23.67 R27.2
N$25
  Top 0.203: D7.1 R28.2
N$26
  Top 0.203: D8.1 R29.2
N$27  (via drill 0.25)
  Top 0.254: R29.1 5.1,37.2 v5.2,37.3 | v30.7,32.04 41.86,32.04 44.94,28.96 U28.12
  Bottom 0.254: v5.2,37.3 24.3,37.3 29.56,32.04 v30.7,32.04
N$28  (via drill 0.25)
  Top 0.254: U28.11 46.41,28 46.53,28.12 46.53,28.46 42.34,32.64 v30,32.64 | v5.1,41.4 4.12,41.4 R28.1
  Bottom 0.254: v30,32.64 21.14,41.5 5.2,41.5 v5.1,41.4
N$29
  Top 0.15: U11.1 14.62,32.38 R20.2
N$30
  Top 0.15: R17.2 12.4,30.83 U7.1
N$91
  Top 0.2: R16.1 8.5,7 | 8.5,7 R14.1 | U25.9 8.4,6.9 8.5,7
PGOOD  (via drill 0.2)
  Top 0.127: U6.7 8.9,12.62 R24.1
  Top 0.15: R24.1 8.33,12.42 v8.11,12.2 | U$5.P$34 18.7,71.16 v18.7,71.17 | v15.51,51.79 14,50.27 14,37.07 v13.64,36.72
  Bottom 0.15: v18.7,71.17 21.13,71.17 22,70.3 22,58 15.79,51.79 v15.51,51.79 | v8.11,12.2 8.45,12.2 10.18,13.93 10.33,13.93 13.56,17.17 13.56,36.64 v13.64,36.72
PTI_DATA  (via drill 0.2)
  Top 0.127: U$1.P$29 81.85,63.78 v81.95,63.88 | X1.10 v78.31,49.84 v78.3,49.85
  Bottom 0.127: v78.3,49.85 78.3,52.25 78.95,52.9 78.95,58.9 81.3,61.25 81.3,63.23 v81.95,63.88
PTI_DATA1  (via drill 0.2)
  Top 0.127: X2.10 v88.56,20.39 v88.55,20.4 | U$3.P$29 82.54,32.03 v82.71,32.2
  Bottom 0.127: v82.71,32.2 82.65,32.14 82.65,30.9 89.07,24.48 89.07,20.92 v88.55,20.4
PTI_DATA2  (via drill 0.2)
  Top 0.15: U$5.P$29 19.2,68.2 v19.4,68.4 | v1.6,83.7 3.46,83.7 X4.10
  Bottom 0.15: v19.4,68.4 18.7,68.4 16.4,70.7 16.4,76.4 8.3,84.5 2.4,84.5 v1.6,83.7
PTI_FRAME  (via drill 0.2)
  Top 0.127: U$1.P$28 81.35,64.15 v81.25,64.25 | X1.9 v78.31,53.44 v78.3,53.45
  Bottom 0.127: v81.25,64.25 80.95,63.95 80.95,61.4 78.3,58.75 v78.3,53.45
PTI_FRAME1  (via drill 0.2)
  Top 0.127: X2.9 v88.56,23.99 v88.55,24 | U$3.P$28 82.04,32.11 v81.95,32.2
  Bottom 0.127: v88.55,24 88.55,24.6 81.95,31.2 v81.95,32.2
PTI_FRAME2  (via drill 0.2)
  Top 0.15: X4.9 7.14,83.5 v5.3,83.5 | v17.3,68.2 17.8,67.7 U$5.P$28
  Bottom 0.15: v5.3,83.5 8.8,83.5 16,76.3 16,69.5 v17.3,68.2
RESET  (via drill 0.2)
  Top 0.127: R2.1 85.36,68.91 v84.75,68.91 U$1.P$1 | X1.3 82.12,53.27 v82.15,53.3
  Bottom 0.127: v82.15,53.3 82.15,61.05 81.58,61.62 81.58,62.61 81.6,62.63 81.6,62.7 82.45,63.55 83.25,63.55 84.75,65.05 v84.75,68.91
RESET1  (via drill 0.2)
  Top 0.127: X2.3 92.37,23.88 v92.35,23.9 | U$3.P$1 85.35,37.41 | 85.35,37.41 85.89,37.41 R6.1 | 85.35,37.41 85.25,37.51 v85.25,37.53
  Bottom 0.127: v92.35,23.9 91.25,23.9 85.45,29.7 85.45,37.33 v85.25,37.53
RESET2
  Top 0.15: X4.3 9.07,79.73 12.72,76.08 R11.1 12.72,70.22 U$5.P$1
RST
  Top 0.15: U11.3 16.4,33.3 16.5,33.2 48.4,33.2 50.6,31 55.08,31 | 54.99,32.69 54.99,32.29
  Top 0.152: 54.98,32.3 54.99,32.29 RESET.2 55.08,31 55.08,30.83 55.83,30.08 R15.1 56.37,29.84 U28.3
  Top 0.2: C25.1 55.08,32.6 RESET.2
RTS
  Top 0.15: 15.6,30.8 15.7,30.8 16.1,30.4 U9.24 | 15.6,30.8 16.1,31.3 U11.2 | R17.1 14.45,30.8 14.48,30.83 14.92,30.83 14.95,30.8 15.6,30.8
RXD  (via drill 0.2)
  Top 0.15: U9.26 15.1,29.81 14.93,29.98 14.93,30.07 v14.7,30.3
  Top 0.152: v53.5,13.61 53.83,13.28 U28.34
  Bottom 0.152: v53.5,13.61 48.99,13.61 31.9,30.7 15.71,30.7 15.68,30.73 15.13,30.73 v14.7,30.3
SCK  (via drill 0.2)
  Top 0.15: v48.5,9 48.75,9.25 U28.30
  Bottom 0.15: SV1.7 43.66,9.43 48.07,9.43 v48.5,9
SDI  (via drill 0.2)
  Top 0.15: v57.5,9.1 57.5,10.86 U28.37
  Bottom 0.15: SV1.6 41.59,9.9 54.9,9.9 55.8,9 57.4,9 v57.5,9.1
SWCLK  (via drill 0.2)
  Top 0.127: U$1.P$13 v79.15,67.95 | X1.8 79.58,49.73 v79.65,49.8
  Bottom 0.127: v79.65,49.8 80.25,50.4 81.25,50.4 81.6,50.05 81.6,49.35 80.25,48 78.25,48 76.62,49.63 76.62,65.22 79.15,67.75 v79.15,67.95
SWCLK1  (via drill 0.2)
  Top 0.127: X2.8 89.83,20.38 v89.85,20.4 | U$3.P$13 79.75,36.45 v79.8,36.5
  Bottom 0.127: v89.85,20.4 90.42,20.4 90.84,20.82 91.27,20.82 91.57,20.52 91.57,20.08 90.98,19.5 88.16,19.5 87.75,19.9 87.75,24.61 79.53,32.83 79.53,34.81 79.29,35.05 79.29,35.99 v79.8,36.5
SWCLK2  (via drill 0.2)
  Top 0.15: U$5.P$13 13.83,64.67 v13.83,64.1 | X4.8 5.23,82.27 v5.3,82.2
  Bottom 0.15: v13.83,64.1 13.83,65.18 14.13,65.48 14.13,75.97 7.85,82.25 5.35,82.25 v5.3,82.2
SWDIO  (via drill 0.2)
  Top 0.127: U$1.P$14 78.92,67.45 78.94,67.43 79.67,67.43 v79.69,67.41 | X1.7 79.65,51.7 v79.65,53.4
  Bottom 0.127: v79.69,67.41 79.69,66.75 77.2,64.26 77.2,49.85 78.05,49 78.7,49 78.95,49.25 78.95,51.35 79.65,52.05 v79.65,53.4
SWDIO1  (via drill 0.2)
  Top 0.127: X2.7 89.83,23.98 v89.85,24 | U$3.P$14 80.25,35.95 v80.29,35.91
  Bottom 0.127: v89.85,24 89.85,24.3 83.23,30.92 83.23,32.41 82.84,32.8 81.15,32.8 80.33,33.62 80.33,35.87 v80.29,35.91
SWDIO2  (via drill 0.2)
  Top 0.15: X4.7 8.63,82.27 v8.9,82 | v14.7,65.7 14.7,65.42 14.2,64.92 U$5.P$14
  Bottom 0.15: v8.9,82 14.7,76.2 v14.7,65.7
SWO  (via drill 0.2)
  Top 0.127: U$1.P$15 79.08,66.95 v79.11,66.91 | X1.6 80.85,49.7 v80.9,49.75
  Bottom 0.127: v80.9,49.75 80.9,49.2 80.05,48.35 78.3,48.35 76.9,49.75 76.9,64.7 v79.11,66.91
SWO1  (via drill 0.2)
  Top 0.127: X2.6 91.1,20.25 v91.05,20.3 | U$3.P$15 79.63,35.45 v79.81,35.26
  Bottom 0.127: v79.81,35.26 79.81,32.94 88.03,24.72 88.03,20.02 88.25,19.8 90.55,19.8 v91.05,20.3
SWO2  (via drill 0.2)
  Top 0.15: U$5.P$15 14.7,64.9 14.85,65.05 14.85,65.07 15.28,65.5 v15.46,65.5 | v2,81 X4.6
  Bottom 0.15: v15.46,65.5 15.43,65.53 15.43,76.22 8.85,82.8 3.8,82.8 v2,81
T_CLK  (via drill 0.2)
  Top 0.15: SV1.10 44.85,3.85 39.83,8.87 v39.7,8.87 | v38.9,21.9 38.9,25.7 39.6,26.4 43,26.4 43.67,27.07 U28.13
  Bottom 0.15: v39.7,8.87 38.9,9.67 v38.9,21.9
T_CS
  Top 0.15: SV1.11 47.39,5.31 44.94,7.76 U28.27
T_DI  (via drill 0.2)
  Top 0.15: U28.16 39.84,23.94 39.43,23.53 39.43,21.48 38.72,20.77 37.6,20.77 v37.6,20.7 | v38.8,7.9 41.6,5.1 42.85,5.1 v42.88,5.08
  Bottom 0.15: v37.6,20.7 37.63,20.67 37.63,8.97 38.7,7.9 v38.8,7.9 | v42.88,5.08 42.98,4.97 49.43,4.97 49.9,4.5 49.9,2.4 49.8,2.3 49.8,2.87 SV1.12
T_DO  (via drill 0.2)
  Top 0.15: U28.14 41.1,26.7 39.27,26.7 38.3,25.73 v38.3,22.5 | v38.6,9.2 38.8,9.4 40.1,9.4 44,5.5 v46,5.5
  Bottom 0.15: v38.3,22.5 38.3,9.5 v38.6,9.2 | v46,5.5 51.1,5.5 52.47,4.13 SV1.13
T_IRQ
  Top 0.15: SV1.14 49.64,8.37 46.88,8.37 46.27,8.98 46.27,10.94 U28.28
TS
  Top 0.15: U6.1 6.25,15.72 R22.2
TXD  (via drill 0.2)
  Top 0.15: U9.25 15.56,29.31 15.56,30.1 v15.46,30.2
  Top 0.152: U28.35 55,11.1 v55,12.6
  Bottom 0.152: v15.46,30.2 15.96,29.7 32.1,29.7 48.8,13 54.6,13 v55,12.6
VBAT  (via drill 0.45)
  Top 0.813: U6.2 4.53,14.97 4.5,15 v4.55,15.05 | v19.9,42.5 23.9,38.5 E1.PAD
  Bottom 0.813: v4.55,15.05 1,18.6 1,42.1 3.1,44.2 18.2,44.2 v19.9,42.5
VBUS  (2 unrouted)
  Top 0.2: J1.A4B9 9.35,29.25 10.1,28.5 U12.1 U12.10
  pour Top: 7.5,24.6 10.3,24.6 11,23.9 11,23 11.4,22.6 12.2,22.6 12.5,22.3 12.5,21.5 12.4,21.4 9.7,21.4 9.5,21.6 9.5,23.5 8.9,24.1 7.5,24.1
  pour Top: 8.8,29.5 5.7,29.5 5,28.8 5,24.5 5.4,24.1 7.8,24.1 7.9,24.2 7.9,24.6 7.1,24.6 6.1,25.6 6.1,27.9 7.2,29 8.8,29
VDD  (via drill 0.25, 0.35)  (4 unrouted)
  Top 0.15: R2.2 85.49,67.14 v85.4,67.05
  Top 0.25: X1.1 v83.39,53.44 v83.4,53.45
  Top 0.254: C3.2 79.85,62.08 U$1.P$25 80.05,63.05 | U$1.P$26 80.05,63.05 | C3.2 79.97,62.05 | 79.97,62.05 79.97,62.55 | 79.97,62.55 79.97,62.67 80.05,62.75 | 80.05,62.75 80.2,62.9 | 80.2,62.9 U$1.P$26 | 80.05,63.05 80.05,62.75 | U$1.P$26 80.35,62.65 | 80.35,62.65 80.35,62.42 79.97,62.05 | C3.2 79.97,62.27 80.35,62.65 | 80.2,62.9 80.2,62.77 79.97,62.55 | C3.2 79.25,61.95 | 79.25,61.95 79.15,61.95 | 79.15,61.95 v79.05,61.95 | v79.05,61.95 78.38,61.95 C4.2 78.88,61.83 79.25,61.45 | C3.2 79.71,61.69 | 79.71,61.69 79.6,61.58 | 79.6,61.58 79.6,61.4 | C2.2 79.15,61.2 79.15,61.35 | 79.15,61.35 79.15,61.45 | 79.15,61.45 79.15,61.95 | C2.2 79.6,61.4 | 79.6,61.58 79.6,61.6 79.4,61.8 | 79.4,61.8 79.25,61.95 | 79.4,61.8 79.6,61.8 79.71,61.69 | v79.05,61.95 79.4,61.6 | 79.4,61.6 79.6,61.4 | 79.6,61.4 79.55,61.35 79.15,61.35 | 79.4,61.6 79.25,61.45 | 79.25,61.45 79.15,61.45 | C1.2 C2.2
  Bottom 0.508: C6.2 U3.3
  pour Route15: 77.3,47.65 87.9,47.65 95,54.75 95,58.35 92.3,61.05 89.2,61.05 86.6,63.65 86.6,67.5 85.7,68.4 50.85,68.4 47.9,65.45 47.9,56.65 50.5,54.05 70.9,54.05
VDD1  (via drill 0.25)  (6 unrouted)
  Top 0.254: U5.1 81.18,18.72 C13.2 80.42,18.75 v79.5,18.75 | U1.1 99.14,25.32 C9.2 98.45,24.62 v98.45,23.9 | X2.1 v93.64,23.99 v93.65,24 | 80.75,31.55 U$3.P$25 80.54,30.77 C10.2 | 80.75,31.55 U$3.P$26 81.04,31.26 | 80.83,30.72 81.04,30.92 | 80.83,30.72 C10.2 | 80.75,31.35 80.75,30.8 80.83,30.72 | 80.75,31.35 80.75,31.55 | 80.75,31.55 81.04,31.26 | 81.04,31.26 81.04,30.92 | 80.75,31.35 80.92,31.17 | 80.92,31.17 81.04,31.06 81.04,31 | C10.2 80.72,30.97 80.92,31.17 | C10.2 80.72,30.25 | 80.72,30.25 80.72,29.7 | 80.72,29.7 80.72,29.66 80.6,29.55 | 80.6,29.55 C7.2 80.55,29.86 81.04,30.35 | C10.2 80.5,30.6 | 80.5,30.6 80.05,30.6 | 80.05,30.6 79.25,30.6 C12.2 79.38,30.38 79.53,30.38 | 79.53,30.38 79.95,29.95 | 79.95,29.95 80.23,29.68 | 80.23,29.68 80.36,29.55 | 80.36,29.55 80.6,29.55 | 80.72,30.25 80.36,29.89 | 80.36,29.89 80.23,29.76 80.23,29.68 | 79.95,29.95 79.95,30.05 80.08,30.17 | 80.5,30.6 80.28,30.38 | 80.28,30.38 80.2,30.3 | 80.2,30.3 80.08,30.17 | C10.2 80.29,30.17 80.08,30.17 | 80.36,29.89 80.08,30.17 | 80.2,30.3 v79.97,30.53 | v79.97,30.53 79.72,30.53 79.87,30.38 | 80.36,28.85 80.36,28.3 C8.2 80.56,28.31 80.9,28.65 | 80.36,28.85 80.36,29.05 | 80.36,29.05 80.36,29.55 | 80.9,28.65 80.9,28.85 | 80.9,28.85 80.9,29.25 80.6,29.55 | 80.9,28.85 80.7,29.05 80.5,29.05 | 80.5,29.05 80.36,29.05 | 80.36,28.85 80.56,28.65 80.9,28.65 | 80.9,28.65 80.5,29.05 | 80.08,30.17 79.87,30.38 | 79.87,30.38 79.53,30.38 | 80.05,30.6 80.28,30.38 | 81.04,30.92 81.04,30.35 | 81.04,30.35 81.04,30.02 80.72,29.7 | C10.2 80.64,30.53 v79.97,30.53 | R6.2 86.06,35.56 v86,35.5 | R10.2 84.94,27 v84.94,26.64
  pour Route15: 100.15,32.2 90.1,32.2 86.45,35.85 69.3,35.85 69.3,17.2 100.25,17.2 100.3,17.25 100.3,32.05
VDD2  (via drill 0.2, 0.25, 0.3)  (32 unrouted)
  Top 0.15: R11.2 11.88,72.47 v11.9,72.5
  Top 0.2: R23.2 R24.2 9,11.47 v9,10.7
  Top 0.203: R27.1 v16.7,23.5 | U9.6 U9.7 12.35,25.5 C36.1 11.05,25.15 v10.7,25.5
  Top 0.254: U$5.P$25 18.6,66.4 | 18.6,66.4 U$5.P$26 18.97,66.33 C16.2 | 18.6,66.4 18.67,66.33 C16.2 | C16.2 v19.7,65.4 | C16.2 20.97,66.33 C14.2 | X4.1 7.24,78.4 v8.9,78.4
  Top 0.406: U28.2 57.73,28.09 C17.2 57.73,30.88 57.67,30.92 | 57.67,30.92 v57.6,31 57.6,31.75 C15.2 | R15.2 57.67,30.92
  Route15 0.2: v9,10.7 11.6,8.1 11.8,8.1
  other vias: 8.2,4.3 0.6,5.3 1.3,5.8 1.3,4.7 0.6,4.1 1.2,3.3 0.6,2.5 1.3,1.9 0.8,1.1 1.7,1 2.4,1.6 8.1,2.5 8.2,3.4 9,3.6 9.7,4.2 9,4.6 9.6,5.3
  pour Top: 0.8,6.5 3.4,6.5 3.5,6.4 3.5,5.4 3.1,5 3.1,1.6 1.5,0 1,0 0,1 0,5.7
  pour Top: 6.6,1.9 6.6,5 6.1,5.5 6.1,6.4 7.7,6.4 7.9,6.2 7.9,5.8 8.1,5.6 8.8,5.6 9.3,6.1 9.3,6.5 9.8,6.5 10.2,6.1 10.2,4 8.1,1.9
  pour Route15: 0.8,7.1 10.2,7.1 16,12.9 16,16.4 9.8,22.6 9.8,64.4 13.2,67.8 13.2,69.4 11.4,71.2 11.4,72.4 6.9,76.9 1.8,76.9 0.1,78.6 0.1,90.1 1.2,91.2 33,91.2 37,87.2 37,40.9 37.9,40 64.5,40 67.25,37.25 67.25,1.25 65.9,-0.1 1.1,-0.1 0,1 0,6.3
VIN  (2 unrouted)
  pour Top: 9.3,16.1 9.3,18.7 9.6,19 12.2,19 12.3,18.9 12.3,18.5 12,18.2 10.6,18.2 10.4,18 10.4,16.3 10.2,16.1
VPROC  (via drill 0.3)  (18 unrouted)
  Top 0.305: U6.10 13.12,14.97 13.4,14.7
  other vias: 1.5,11 1.3,11.9 1.4,12.8 2.2,13.3 3.3,13.4 4.4,13.4 5.4,13.4 6.4,13.4 13.1,14.1 13.7,14.7 12.8,14.8
  pour Top: 6.1,10 7.7,10 8,10.3 8,13.8 1.9,13.8 1,12.9 1,10.8 1.8,10 3.5,10 3.5,10.9 3.2,11.2 3.2,12.8 3.4,13 6.1,13 6.4,12.7 6.4,11.1 6.1,10.8
  pour Top: 1.9,9.4 1.9,10.2 2.8,10.2 2.8,9.4
  pour Top: 9.8,14.7 9.8,15.2 13.5,15.2 13.9,14.8 13.9,14 13.7,13.8 12.9,13.8 12.4,14.3 11.4,14.3 11,14.7
  pour Route15: 1,10.7 1,13.3 1.7,14 11.3,14 12.5,15.2 13.7,15.2 14.1,14.8 14.1,14.1 10.6,10.6 1.1,10.6

## Text on the board
tPlace: STAT | CR2450 | COMMS | STAT | COMMS
bPlace: CR2450
tStop: PIRSN | CPN | v1.0 | v1.0 | ACSN | v1.0